# EAGLE board Circuito Garra e Serra (EAGLE 9.7.0)

Size 184.93 x 121.04 mm. Coordinates in mm from the lower left corner, seen from the top.
Outline: 0,0 184.93,0 184.93,121.04 0,121.04 0,0
Copper layers (1*16): Top 0.035mm / dielectric 1.5mm / Bottom 0.035mm
Design rules "default": minimum track width 6mil, minimum drill 0.35mm, track to track 6mil, track to pad 6mil, pad to pad 6mil, via to via 6mil, smd to smd 6mil, copper to edge 40mil, drill to drill 6mil, minimum pad ring 10mil, minimum via ring 8mil, stop-mask expansion 4mil, vias tented up to drill 0mil, thermal gap 10mil

## Footprints (pad centres in the part's own frame; a part is rotated, then mirrored left to right if it is on the bottom)
BATTERY-GENERIC = drill 1.118 pad 3.15 octagon: + 2.54,0; - -2.54,0
RESAD1016W63L850D250B = drill 0.83 pad 1.43: 1 -5.08,0; 2 5.08,0
SWITCH-MOMENTARY-PTH-6.5MM = drill 1.016 pad 1.88: 1 -3.251,2.261; 2 3.251,2.261; 3 -3.251,-2.261; 4 3.251,-2.261
SG90 = drill 1.016 long: 1 -2.54,0; 2 0,0; 3 2.54,0
ARDUINO-UNO-R3-SHIELD = drill 1.016 pad 1.88: 3.3V 24.13,-2.54; 5V 24.13,0; A0 24.13,12.7; A1 24.13,15.24; A2 24.13,17.78; A3 24.13,20.32; A4 24.13,22.86; A5 24.13,25.4; AREF -24.13,-13.97; D2 -24.13,20.32; D3 -24.13,17.78; D4 -24.13,15.24; D5 -24.13,12.7; D6 -24.13,10.16; D7 -24.13,7.62; D8 -24.13,3.81; D9 -24.13,1.27; D10 -24.13,-1.27; D11 -24.13,-3.81; D12 -24.13,-6.35; D13 -24.13,-8.89; GND@0 24.13,2.54; GND@1 24.13,5.08; GND@2 -24.13,-11.43; IOREF 24.13,-7.62; NC 24.13,-10.16; RES 24.13,-5.08; RX -24.13,25.4; SCL -24.13,-19.05; SDA -24.13,-16.51; TX -24.13,22.86; VIN 24.13,7.62

## Placement (x,y rotation side)
BAT1  4.5V  [BATTERY-GENERIC]  96.96,112.78 180 top
R1  1k  [RESAD1016W63L850D250B]  105.82,63.99 90 top
R2  1k  [RESAD1016W63L850D250B]  105.82,84.31 90 top
S1  SWITCH_MOMENTARY  [SWITCH-MOMENTARY-PTH-6.5MM]  117.25,81.77 0 top
S2  SWITCH_MOMENTARY  [SWITCH-MOMENTARY-PTH-6.5MM]  117.25,71.61 0 top
SERVO1  SERVOSG90  [SG90]  176.51,24.1 90 top
SERVO2  SERVOSG90  [SG90]  177.94,54.05 90 top
U1  ARDUINO-UNO-R3-SHIELD  [ARDUINO-UNO-R3-SHIELD]  29.84,34.52 180 top

## Library data of the parts
BAT1 R1 R2 S1 S2 SERVO1 SERVO2 U1 = Tinkercad

## Nets
BAT1+: BAT1.+ S1.1 S1.2 S2.1 S2.2 SERVO1.2 SERVO2.2
BAT1-: BAT1.- R1.1 R2.2 SERVO1.1 SERVO2.1 U1.GND@0 U1.GND@1 U1.GND@2
U1_A0: R2.1 S1.3 S1.4 U1.A0
U1_A1: R1.2 S2.3 S2.4 U1.A1
U1_RX: SERVO1.3 U1.RX
U1_TX: SERVO2.3 U1.TX

## Tracks (layer width: path | path; a pad name or v marks a point on that pad's centre or on a via)
BAT1+  (6 unrouted)
BAT1-  (7 unrouted)
U1_A0  (3 unrouted)
U1_A1  (3 unrouted)
U1_RX  (1 unrouted)
U1_TX  (1 unrouted)